# Altium PCB PressureSensor.PcbDoc
Units mil, origin at the board's own origin, x right, y up, seen from the top; angles counter-clockwise.
Board outline 1968.5 x 1968.5 mil, 2 copper layers (Component Side, Bottom Layer), stack 62.8 mil thick; 51 components, 36 nets, 199 pads, 69 vias.
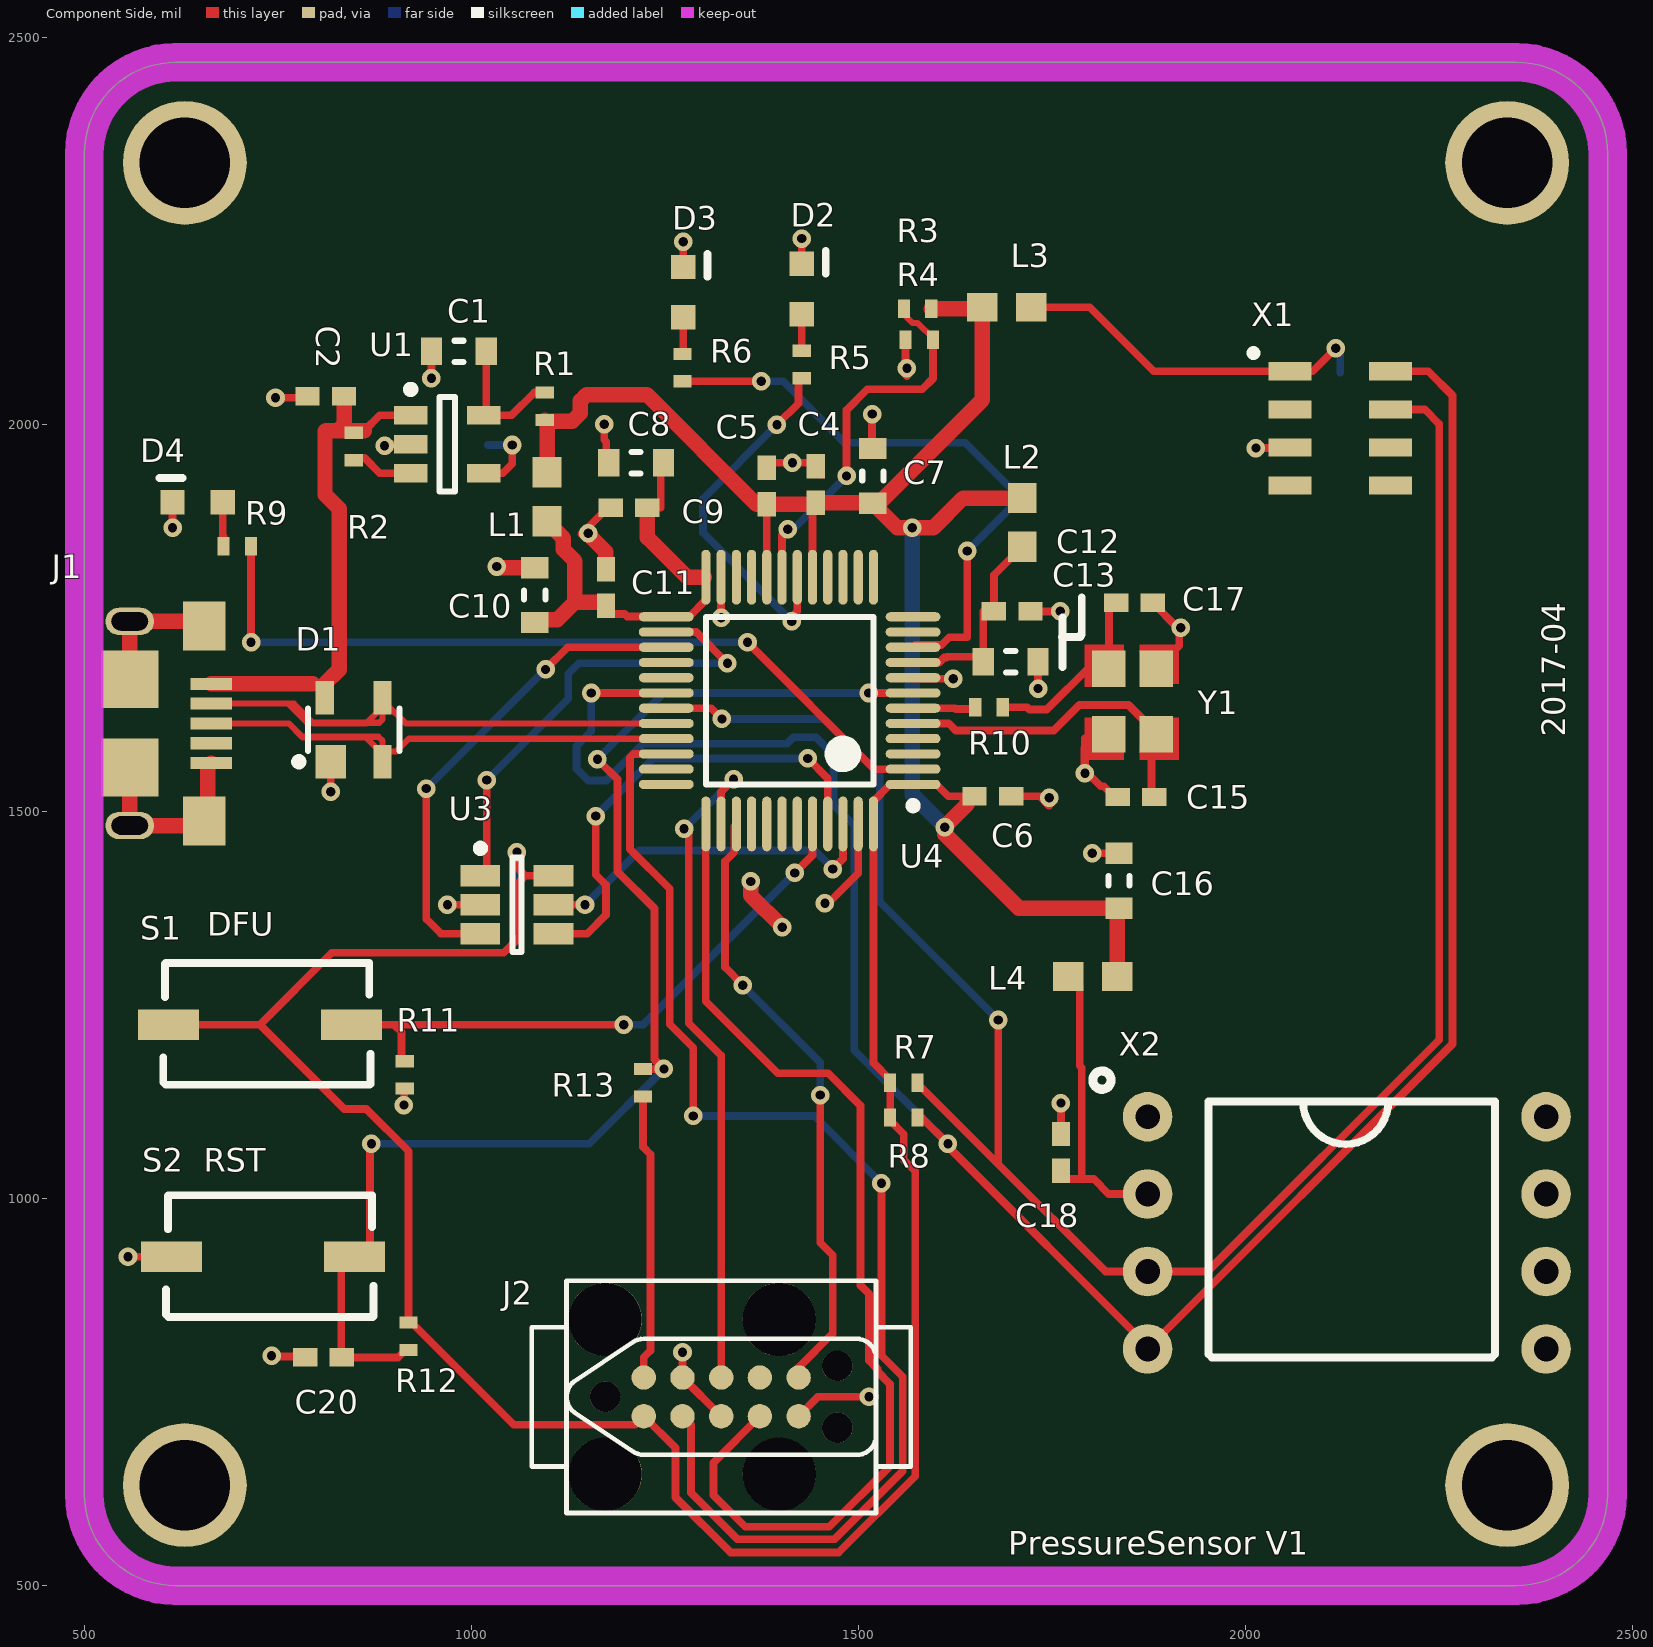
[diagram p0: Component Side view]
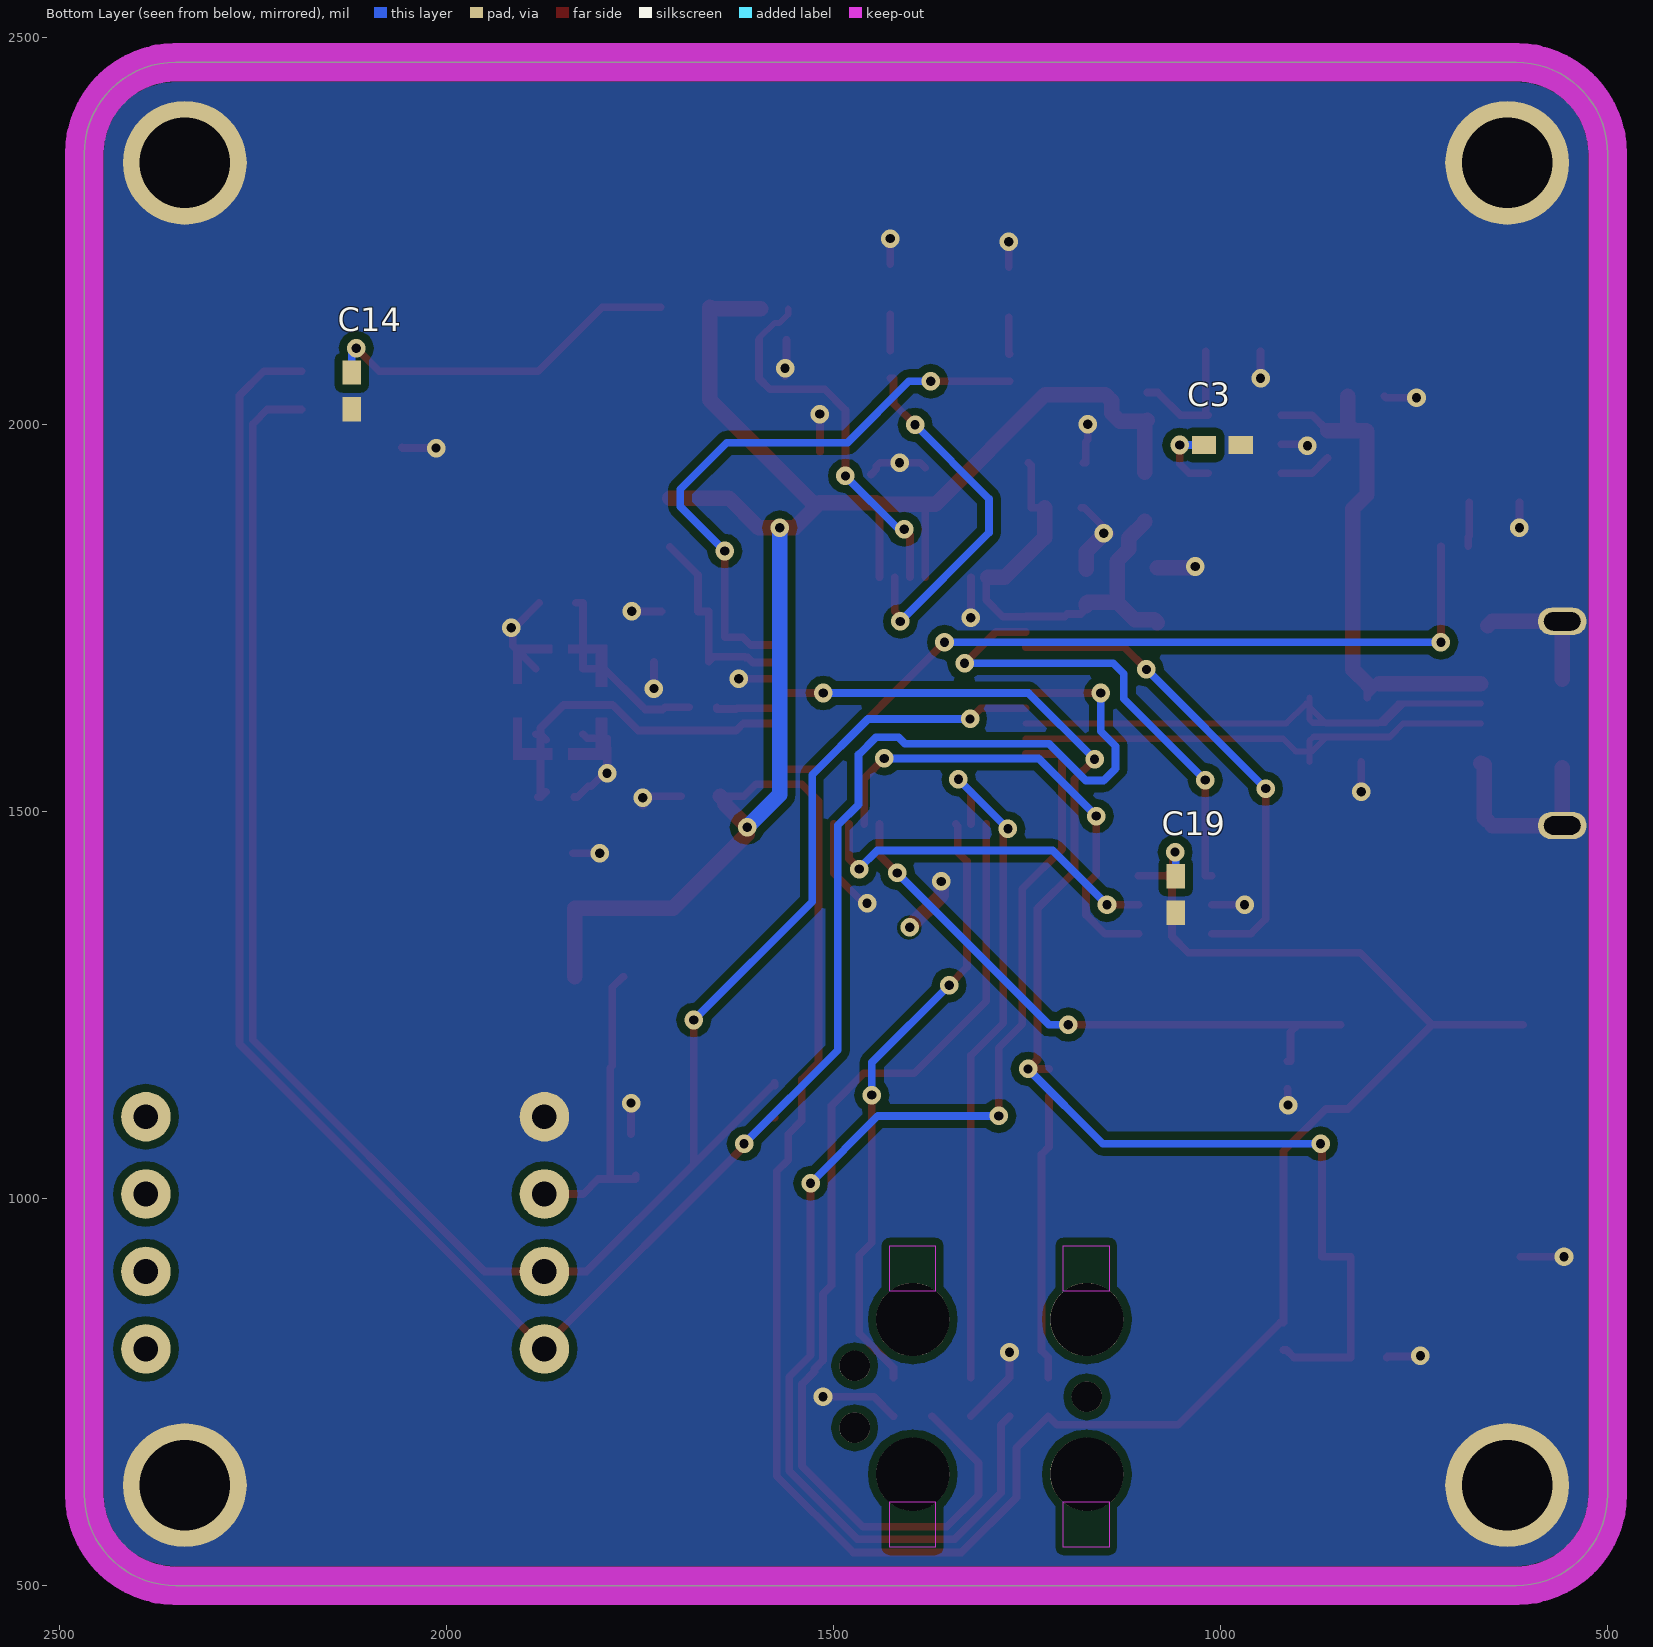
[diagram p1: Bottom Layer view, seen from below]
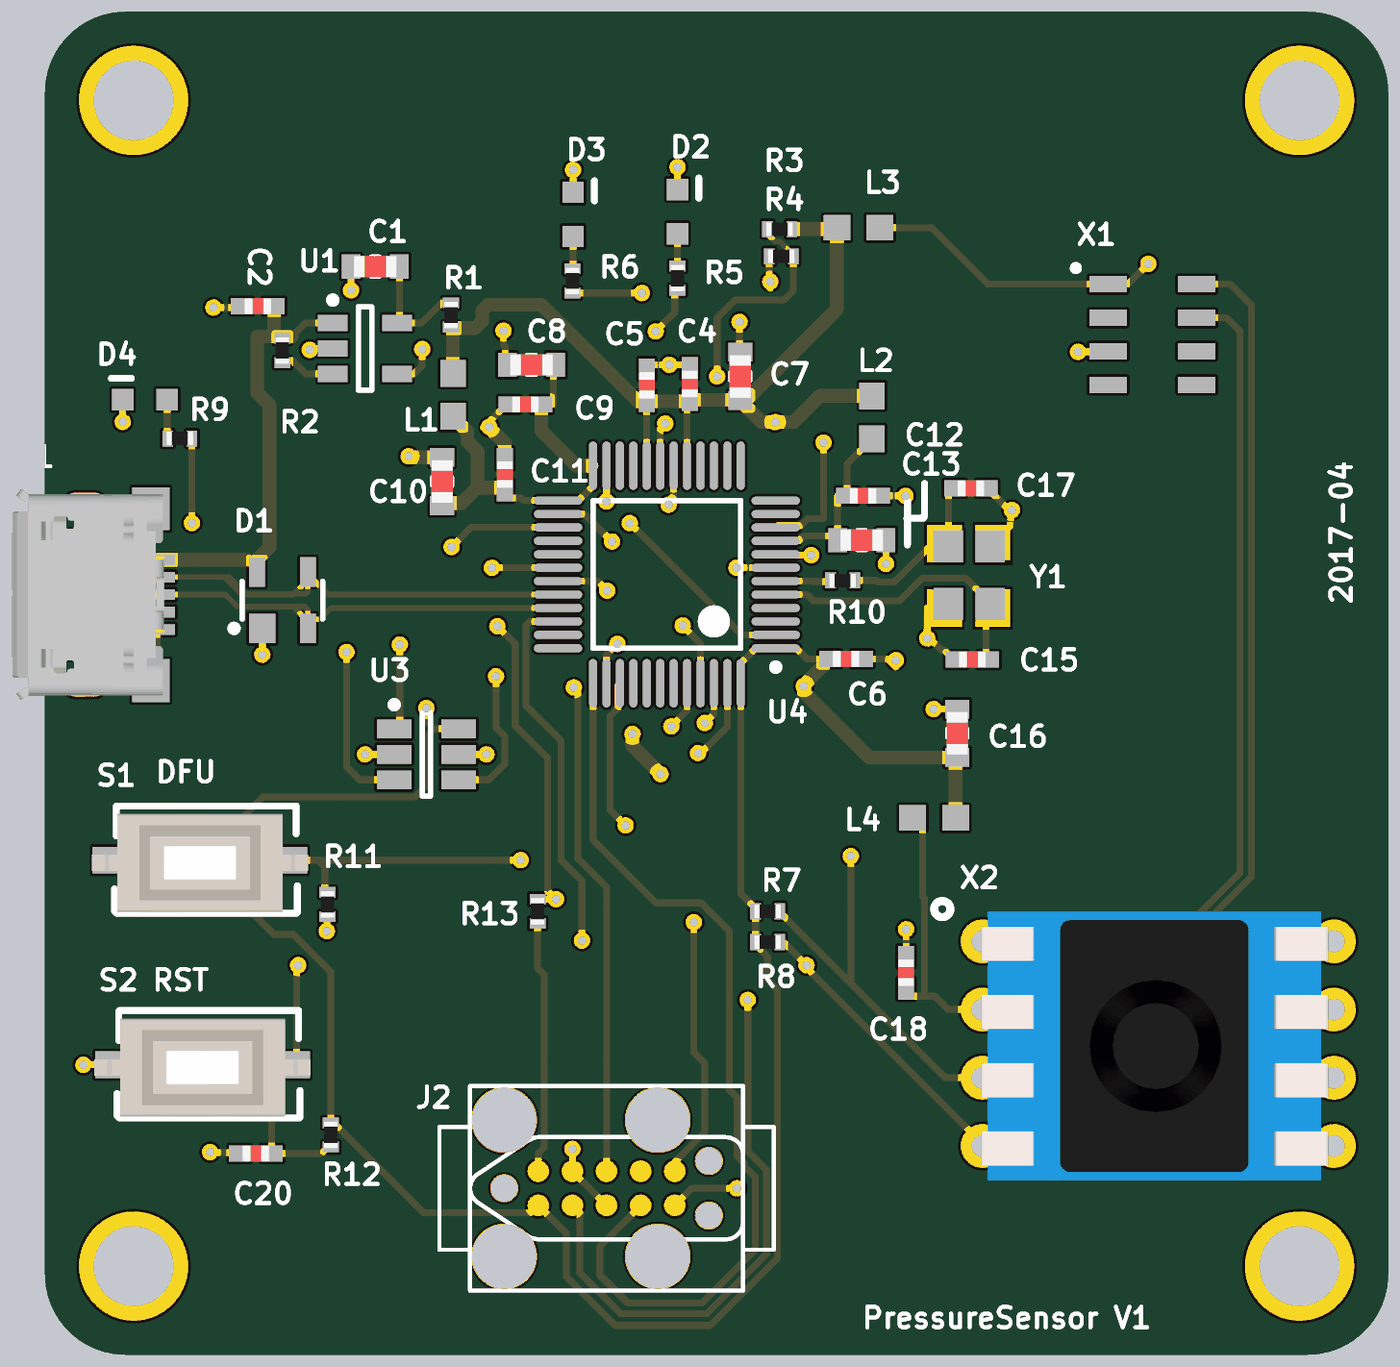
[diagram p2: 3D render of the assembled board from above, using the file's embedded part models]
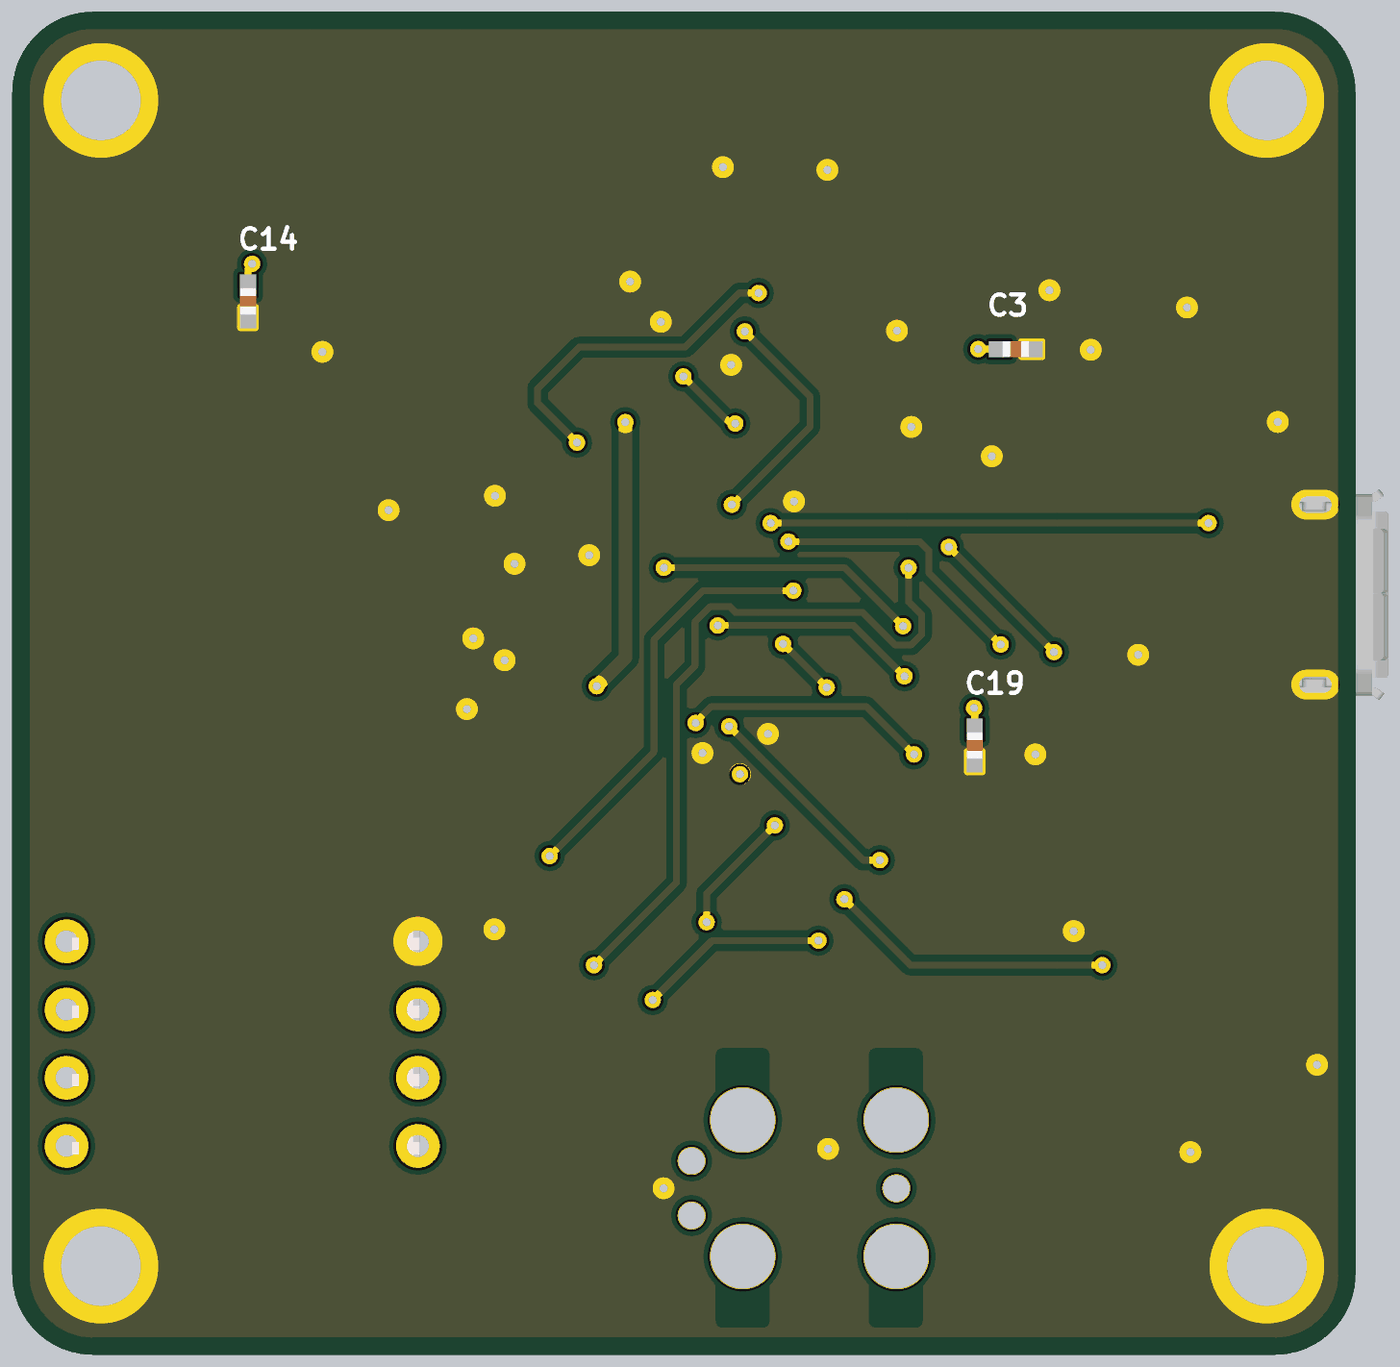
[diagram p3: 3D render of the assembled board from below, using the file's embedded part models]

## Layer stack, top to bottom
Top Solder: solder mask 0.4, Solder Resist, Dk 3.5
Component Side: signal copper 1.4
Dielectric 1: core 60, FR-4, Dk 4.2
Bottom Layer: signal copper 1.4
Solder Side: solder mask 0.4, Solder Resist, Dk 3.5

## Board outline
618.11,500 cw(c618.11,618.11) 500,618.11 500,2350.39 cw(c618.11,2350.39) 618.11,2468.5 2350.39,2468.5 cw(c2350.39,2350.39) 2468.5,2350.39 2468.5,618.11 cw(c2350.39,618.11) 2350.39,500

## Design rules (kind name [scope] priority, off if disabled: settings)
Clearance CPWGND2KEEPOUT [InNet('GND') vs OnLayer('Keep-Out Layer')] p1: gap=0 ignorepadtopadclearanceinfootprint=FALSE
Clearance BlockingCapClear [InPadClass('RFBlockingCapPadClass') vs InNet('GND')] p2: gap=15 ignorepadtopadclearanceinfootprint=FALSE except(0: Arc-Hole Track-Hole SMDPad-Hole THPad-Hole Via-Hole Fill-Hole Poly-Hole Region-Hole Text-Hole)
Clearance ClearanceCoplanar [(InPolygon AND InNet('GND')) vs InNetClass('Coplanar')] p3: gap=7 ignorepadtopadclearanceinfootprint=FALSE except(0: Arc-Hole Track-Hole SMDPad-Hole THPad-Hole Via-Hole Fill-Hole Poly-Hole Region-Hole Text-Hole)
Clearance PolyRegion [(IsRegion AND OnLayer('Top Layer'))] p4: gap=5 ignorepadtopadclearanceinfootprint=FALSE except(0: Arc-Hole Track-Hole SMDPad-Hole THPad-Hole Via-Hole Fill-Hole Poly-Hole Region-Hole Text-Hole)
Clearance ClearanceTrackTrack [(IsTrack OR IsPad) vs (IsTrack OR IsPad)] p5: gap=6 ignorepadtopadclearanceinfootprint=FALSE except(0: Arc-Hole Track-Hole SMDPad-Hole THPad-Hole Via-Hole Fill-Hole Poly-Hole Region-Hole Text-Hole)
Clearance Fill [(IsFill AND OnLayer('Top Layer'))] p6: gap=5 ignorepadtopadclearanceinfootprint=FALSE except(0: Arc-Hole Track-Hole SMDPad-Hole THPad-Hole Via-Hole Fill-Hole Poly-Hole Region-Hole Text-Hole)
Clearance OtherFillClearance [NOT InNamedPolygon('TOPCOPLANAR')] p7: gap=10 ignorepadtopadclearanceinfootprint=FALSE except(0: Arc-Hole Track-Hole SMDPad-Hole THPad-Hole Via-Hole Fill-Hole Poly-Hole Region-Hole Text-Hole)
DiffPairsRouting [All] p1: maxlimit=15 minlimit=8 mostfreqgap=10 toplayer_minwidth=5 toplayer_maxwidth=15 toplayer_prefwidth=8 bottomlayer_minwidth=5 bottomlayer_maxwidth=15 bottomlayer_prefwidth=8 maxuncoupledlength=500
MinimumSolderMaskSliver SilkToSolderMaskClearance [IsPad] p2: minsoldermaskwidth=10
MinimumSolderMaskSliver SilkscreenOverComponentPads [All] p3: minsoldermaskwidth=10
PlaneClearance PlaneClearance_1 [OnLayer('Keep-Out Layer')] p1 off: clearance=0
PlaneClearance [All] p2: clearance=7
PlaneConnect [All] p1: planeconnectstyle=Direct reliefexpansion=20 reliefentries=4 reliefconductorwidth=10 reliefairgap=7
PolygonConnect [All] p1: connectstyle=Direct reliefconductorwidth=10 reliefentries=4 polygonreliefangle="90 Angle" airgapwidth=10
RoutingCorners RoutingCorners_RF [InNetClass('RF')] p1: cornerstyle=Round minsetback=400 maxsetback=400
RoutingCorners [All] p2: cornerstyle=45-Degree minsetback=100 maxsetback=100
RoutingVias [All] p1: holewidth=12 width=24 viastyle="Through Hole" minholewidth=8 minwidth=16 maxholewidth=250 maxwidth=160
SilkToSolderMaskClearance SilkToSolderMaskClearance_1 [IsPad] p1: minsilkscreentomaskgap=10 clearancetoexposedcopper=TRUE
SolderMaskExpansion [All] p1: expansion=4
Width [All] p1: maxlimit=200 minlimit=4 preferedwidth=10
25 further rules are at their usual default settings.

## Classes and differential pairs
component class Sheet1: C1 C2 C3 C4 C5 C6 C7 C8 C9 C10 C11 C12 C13 D1 J1 L1 L2 R1 R2 R3 R4 U1
component class Sheet2: C14 C15 C16 C17 C18 C19 C20 D2 D3 D4 J2 L3 L4 R5 R6 R7 R8 R9 R10 R11 R12 R13 S1 S2 U3 U4 X1 X2 Y1
differential pair USB: +USB_P -USB_N

## Components (designator, comment, footprint, x,y, rotation, side; value= is the part's Value field where it differs from the comment)
C1 "4.7uF" CAP0603 984,2095 r0 top
C2 "1uF" CAP0402 812,2037 r0 top
C3 "0.1uF" CAP0402 998,1974 r0 bottom
C4 "0.1uF" CAP0402 1445,1923 r90 top
C5 "0.1uF" CAP0402 1382,1921 r270 top
C6 "0.1uF" CAP0402 1674,1520 r180 top
C7 "4.7uF" CAP0603 1519,1934 r270 top
C8 "1uF" CAP0603 1213,1951 r0 top
C9 "0.01uF" CAP0402 1204,1893 r0 top
C10 "1uF" CAP0603 1082,1780 r270 top
C11 "0.01uF" CAP0402 1174,1790 r270 top
C12 "0.1uF" CAP0402 1699,1759 r180 top
C13 "1uF" CAP0603 1697,1694 r180 top
C14 "0.01uF" CAP0402 2123,2044 r270 bottom
C15 "30pF" CAP0402 1859,1519 r0 top
C16 "4.7uF" CAP0603 1837,1411 r90 top
C17 "30pF" CAP0402 1857,1770 r180 top
C18 "0.01uF" CAP0402 1762,1060 r90 top
C19 "0.1uF" CAP0402 1058,1393 r270 bottom
C20 "1uF" CAP0402 809,795 r0 top
D1 "PRTR5V0U2X" SOT190P230X110-4N 848,1606 r90 top
D2 "GRN" KINGBRIGHT_LED 1427,2143.04 r90 top
D3 "RED" KINGBRIGHT_LED 1274,2139.04 r90 top
D4 "RED" KINGBRIGHT_LED 678.96,1900 r180 top
J1 "FCI10118193" FCI_10118193 664,1614.18 r270 top locked
J2 "TagConnect TC2050" TC2050-IDC 1223,719 r0 top
L1 "MMZ1608Y102B" INDC1608X06N 1098,1907 r270 top
L2 "MMZ1608Y102B" INDC1608X06N 1712,1874 r270 top
L3 "MMZ1608Y102B" INDC1608X06N 1692,2152 r180 top
L4 "MMZ1608Y102B" INDC1608X06N 1803,1287 r0 top
R1 "0.1" RES0402 1095,2024 r270 top
R2 "10.0K" RES0402 848,1972 r270 top
R3 "0" RES0402 1576.72,2150 r0 top
R4 "100K" RES0402 1579,2110 r0 top
R5 "100" RES0402 1427,2078 r90 top
R6 "100" RES0402 1273,2074 r270 top
R7 "10.0K" RES0402 1559,1150 r0 top
R8 "10.0K" RES0402 1559,1105 r0 top
R9 "100" RES0402 697.72,1843 r0 top
R10 "100" RES0402 1669,1635 r0 top
R11 "10.0K" RES0402 914,1160 r270 top
R12 "10.0K" RES0402 919,822.28 r90 top
R13 "0" RES0402 1222,1150 r90 top
S1 "PTS635" PTS635 845.22,1225 r180 top
S2 "PTS635" PTS635 849,925 r180 top
U1 "" TI-DBV5_N 969,1975 r0 top
U3 "93AA66AT" SOT-23-OT6_M 1059,1380 r0 top
U4 "" STM-LQFP48_N 1411.45,1643.73 r180 top
X1 "MS860702BA01-50" TETempHumidityPressSens 2058,2069.21 r0 top
X2 "SSCDANN150PG2A3" HoneywellPsenseDIP 1874.04,1106 r0 top
Y1 "16.000 MHz" CRYSTAL_SMD_3.2x2.5 1824,1685 r270 top

## Footprints (in the part's own frame and the unit in brackets; to place one, negate y for a bottom-side part, rotate by r counter-clockwise, add the part's x,y. Pads: shape width x height; smd on the part's side, far side on the other; paste and mask are expansions set on the pad)
CAP0402 [mm] "Chip Capacitor, 2-Leads, Body 1.0x0.5mm, IPC Medium Density"
  rect 0.8x0.6 smd: 1(-0.6,0) 2(0.6,0)
  body extent -0.5,-0.3 0.5,0.3, height 0.2
CAP0603 [mm] "Chip Capacitor, 2-Leads, Body 1.6x0.8mm, IPC Medium Density"
  rect 0.7x0.9 smd: 1(-0.9,0) 2(0.9,0)
  silkscreen extent -0.15,-0.35 0.15,0.35, body extent -0.8,-0.4 0.8,0.4, height 0.3
CRYSTAL_SMD_3.2x2.5 [mm] "CTS Model 403 Crystal 3.2mm x 2.5mm"
  rect 1.2x1.1 smd: 1(0,0) 2(2.15,0) 3(2.15,1.55) 4(0,1.55)
  Component Side region: -0.8,-0.5 -0.5,-0.5 -0.5,0.5 -0.8,0.5
  Component Side region: -0.8,-0.8 0.6,-0.8 0.6,-0.4 -0.8,-0.4
  Component Side region: -0.8,1 -0.5,1 -0.5,2.3 -0.8,2.3
  Component Side region: -0.8,2 0.5,2 0.5,2.3 -0.8,2.3
  Component Side region: 1.6,-0.8 3,-0.8 3,-0.4 1.6,-0.4
  Component Side region: 2.6,-0.8 3,-0.8 3,0.5 2.6,0.5
  Component Side region: 1.6,2 3,2 3,2.3 1.6,2.3
  Component Side region: 2.6,1 3,1 3,2.3 2.6,2.3
  body extent -0.53,-0.48 2.67,2.02, height 0.8
FCI_10118193 [mm] "USB MICRO-B FEMALE TH GND"
  rect 0.4x1.35 smd: 1(-1.3,0) 2(-0.65,0) 3(0,0) 4(0.65,0) 5(1.3,0)
  oval 0.9x1.6 hole 0.6 slot 1.2 at 90 deg: 6(-3.35,-2.675) 6(3.35,-2.675)
  rect 1.6x1.4 smd: 6(-3.2,-0.225) 6(3.2,-0.225)
  rect 1.9x1.9 smd: 6(-1.45,-2.675) 6(1.45,-2.675)
  body extent -3.93,-5.39 3.93,0.27, height 2.8
HoneywellPsenseDIP [mm] "Honeywell Pressure Sensor DIP AN package"
  round 1.626 hole 0.813: 1(0,0) 2(0,-2.54) 3(0,-5.08) 4(0,-7.62) 5(13.08,-7.62) 6(13.08,-5.08) 7(13.08,-2.54) 8(13.08,0)
  silkscreen extent -1.8,-7.9 11.4,1.5, body extent -0.08,-8.9 12.88,1.1, height 14.8
INDC1608X06N [mm] "Chip Inductor, 2-Leads, Body 1.6x0.8mm, IPC Medium Density"
  rect 1x0.95 smd: 1(-0.8,0) 2(0.8,0)
  body extent -0.88,-0.48 0.87,0.48, height 0.6
KINGBRIGHT_LED [mm] "Kingbright APT1608 LED"
  rect 0.8x0.8 smd: 1(0,0) 2(1.65,0)
  silkscreen extent 1.33,-0.79 2.08,-0.79, body extent 0.03,-0.4 1.63,0.4, height 0.76
PTS635 [mm] "Pushbutton switch 6x3.5mm"
  rect 2x1 smd: 1(0,0) 2(6,0)
  silkscreen extent -0.63,-2.02 6.18,1.98, body extent -1.03,-1.73 7.02,1.93, height 2.51
RES0402 [mm]
  rect 0.4x0.6 smd: 1(-0.45,0) 2(0.45,0)
  body extent -0.5,-0.25 0.5,0.25, height 0.3
SOT190P230X110-4N [mm] "SOT143, 4-Leads, Body 3.0x2.5mm (max), Pitch 1.90mm, IPC Medium Density"
  rect 1.1x1 smd: 1(-1.05,0.75)
  rect 1.1x0.6 smd: 2(-1.05,-0.95) 3(1.05,-0.95) 4(1.05,0.95)
  silkscreen extent -1.17,-1.5 0.7,1.92, body extent -0.7,-1.5 0.7,1.5, height 1.1
SOT-23-OT6_M [mm] "SOT23, 6-Leads, Body 2.9x1.7mm, Pitch 0.95mm, Lead Span 2.8mm, IPC Low Density"
  rect 1.3x0.7 smd: 1(-1.2,0.95) 2(-1.2,0) 3(-1.2,-0.95) 4(1.2,-0.95) 5(1.2,0) 6(1.2,0.95)
  silkscreen extent -1.32,-1.55 0.15,1.97, body extent -0.9,-1.55 0.9,1.55, height 1.45
STM-LQFP48_N [mm] "QFP, 48-Leads, Body 7x7mm, Pitch 0.5mm, IPC Medium Density"
  oval 1.8x0.3 smd: 1(-4.05,2.75) 2(-4.05,2.25) 3(-4.05,1.75) 4(-4.05,1.25) 5(-4.05,0.75) 6(-4.05,0.25) 7(-4.05,-0.25) 8(-4.05,-0.75) 9(-4.05,-1.25) 10(-4.05,-1.75) 11(-4.05,-2.25) 12(-4.05,-2.75) 25(4.05,-2.75) 26(4.05,-2.25) 27(4.05,-1.75) 28(4.05,-1.25) 29(4.05,-0.75) 30(4.05,-0.25) 31(4.05,0.25) 32(4.05,0.75) 33(4.05,1.25) 34(4.05,1.75) 35(4.05,2.25) 36(4.05,2.75)
  oval 0.3x1.8 smd: 13(-2.75,-4.05) 14(-2.25,-4.05) 15(-1.75,-4.05) 16(-1.25,-4.05) 17(-0.75,-4.05) 18(-0.25,-4.05) 19(0.25,-4.05) 20(0.75,-4.05) 21(1.25,-4.05) 22(1.75,-4.05) 23(2.25,-4.05) 24(2.75,-4.05) 37(2.75,4.05) 38(2.25,4.05) 39(1.75,4.05) 40(1.25,4.05) 41(0.75,4.05) 42(0.25,4.05) 43(-0.25,4.05) 44(-0.75,4.05) 45(-1.25,4.05) 46(-1.75,4.05) 47(-2.25,4.05) 48(-2.75,4.05)
  silkscreen extent -4.18,-2.75 2.75,3.57, body extent -3.5,-3.5 3.5,3.5, height 1.6
TC2050-IDC [mm]
  round 0.8 smd paste-0.9: 1(0,0) 2(1.27,0) 3(2.54,0) 4(3.81,0) 5(5.08,0) 6(5.08,1.27) 7(3.81,1.27) 8(2.54,1.27) 9(1.27,1.27) 10(0,1.27)
  round 1 hole 1 paste-1.1: A(-1.27,0.635) B(6.35,-0.381) C(6.35,1.651)
  round 2.4 hole 2.4 paste-2.5: D(-1.27,-1.905) E(4.445,-1.905) F(4.445,3.175) G(-1.27,3.175)
  Bottom Layer keep-out region: 3.7,4.1 5.2,4.1 5.2,5.6 3.7,5.6
  Bottom Layer keep-out region: -2,4.1 -0.5,4.1 -0.5,5.6 -2,5.6
  Bottom Layer keep-out region: 3.7,-4.3 5.2,-4.3 5.2,-2.8 3.7,-2.8
  Bottom Layer keep-out region: -2,-4.3 -0.5,-4.3 -0.5,-2.8 -2,-2.8
  silkscreen extent -3.68,-3.17 8.76,4.44
TETempHumidityPressSens [mm] "TE Connectivity MS8607-02BA01"
  rect 1.4x0.6 smd: 1(0,0) 2(0,-1.25) 3(0,-2.5) 4(0,-3.75) 5(3.3,-3.75) 6(3.3,-2.5) 7(3.3,-1.25) 8(3.3,0)
  silkscreen extent -1.3,0.5 -1.1,0.7
TI-DBV5_N [mm] "SOT23, 5-Leads, Body 2.9x1.6mm, Pitch 0.95mm, IPC Medium Density"
  rect 1.1x0.6 smd: 1(-1.2,0.95) 2(-1.2,0) 3(-1.2,-0.95) 4(1.2,-0.95) 5(1.2,0.95)
  silkscreen extent -1.32,-1.55 0.25,1.92, body extent -0.87,-1.52 0.87,1.53, height 1.45

## Part data
C1 C7 C16: library part 878, "CAP 4.7uF +/-10% 10V X6S 0603", Dielectric=X6S, Manufacturer=TDK, Manufacturer PN=C1608X6S1A475K, Tolerance=+/-10%, Voltage=10V, ComponentLink1Description=Datasheet, ComponentLink1URL=http://www.tdk.com/pdf/general_B11.pdf, ID=878, MaxComponentHeight=0.9mm, PkgCode=0603
C2 C20: library part 596, "CAP 1uF +/-10% 10V X5R 0402", Dielectric=X5R, Manufacturer=TDK, Manufacturer PN=C1005X5R1A105K, Tolerance=+/-10%, Voltage=10V, ComponentLink1Description=Datasheet, ComponentLink1URL=http://www.tdk.com/pdf/general_B11.pdf, ID=596, MaxComponentHeight=0.55mm, PkgCode=0402
C3 C4 C5 C6 C12 C19: library part 485, "CAP 0.1uF +/-10% 25V X7R 0402", Dielectric=X7R, Manufacturer=TDK, Manufacturer PN=C1005X7R1E104K, Tolerance=+/-10%, Voltage=25V, ComponentLink1Description=Datasheet, ComponentLink1URL=http://www.tdk.com/pdf/general_B11.pdf, ID=485, MaxComponentHeight=0.55mm, PkgCode=0402
C8 C10 C13: library part 820, "CAP 1uF +/-10% 25V X7R 0603", Dielectric=X7R, Manufacturer=TDK, Manufacturer PN=C1608X7R1E105K, Tolerance=+/-10%, Voltage=25V, ComponentLink1Description=Datasheet, ComponentLink1URL=http://www.tdk.com/pdf/general_B11.pdf, ID=820, MaxComponentHeight=0.9mm, PkgCode=0603
C9 C11 C14 C18: library part 514, "CAP 0.01uF +/-20% 50V X6S 0402", Dielectric=X6S, Manufacturer=TDK, Manufacturer PN=C1005X6S1H103M, Tolerance=+/-20%, Voltage=50V, ComponentLink1Description=Datasheet, ComponentLink1URL=http://www.tdk.com/pdf/general_B11.pdf, ID=514, MaxComponentHeight=0.55mm, PkgCode=0402
C15 C17: library part 388, "CAP 30pF +/-5% 50V C0G 0402", Dielectric=C0G, Manufacturer=TDK, Manufacturer PN=C1005C0G1H300J, Tolerance=+/-5%, Voltage=50V, ComponentLink1Description=Datasheet, ComponentLink1URL=http://www.tdk.com/pdf/general_B11.pdf, ID=388, MaxComponentHeight=0.55mm, PkgCode=0402
D1: "Diode Array, ESD Protection 1pF USB2.0 SOT143", Manufacturer="NXP Semiconductors", Supplier Part Number 1=568-4140-1-ND, ComponentLink1Description=Datasheet, ComponentLink1URL=http://www.nxp.com/documents/data_sheet/PRTR5V0U2X.pdf, Manufacturer PN=PRTR5V0U2X, Supplier 1=Digi-Key, Supplier 2=Mouser, Supplier 3=Newark, Supplier Part Number 2=771-PRTR5V0U2X-T/R, Supplier Part Number 3=75R4845
D2: library part LED_GRN_SMD_0603, "LED 1.6X0.8MM 568NM GRN CLR SMD", Manufacturer=Kingbright, Manufacturer PN=APT1608SGC, Supplier Part Number 1=604-APT1608SGC, ComponentLink1Description=Datasheet, ComponentLink1URL=http://www.us.kingbright.com/images/catalog/SPEC/APT1608SURCK.pdf, Supplier 1=Mouser, Supplier 2=Digi-Key, Supplier 3=Newark, Supplier Part Number 2=754-1121-6-ND, Supplier Part Number 3=75R0578
D3 D4: library part LED_RED_SMD_0603, "LED 1.6X0.8MM 630NM RED CLR SMD", Manufacturer=Kingbright, Manufacturer PN=APT1608SURCK, Supplier Part Number 1=604-APT1608SURCK, ComponentLink1Description=Datasheet, ComponentLink1URL=http://www.us.kingbright.com/images/catalog/SPEC/APT1608SURCK.pdf, Supplier 1=Mouser, Supplier 2=Digi-Key, Supplier 3=Newark, Supplier Part Number 2=754-1123-1-ND, Supplier Part Number 3=75R0573
J1: library part CONN_USB_MICRO-B_HORIZ_TH, "Connector Receptacle USB - micro B 2.0 5 Position Surface Mount, Right Angle, Horizontal", Manufacturer=FCI, Manufacturer PN=10118193-0001LF, Supplier Part Number 1=70236827, Supplier 1=Allied, Supplier 2=Digi-Key, Supplier Part Number 2=609-4616-1-ND
J2: library part TC2050_ARMJTAG, "TagConnect TC2050-IDC For ARM JTAG", Manufacturer="Tag-Connect LLC", Manufacturer PN=TC2050-IDC, ComponentLink1Description=Datasheet, ComponentLink1URL=http://www.tag-connect.com/Materials/TC2050-IDC%20Datasheet.pdf
L1 L2 L3 L4: "Ferrite, 1000oh, 400mA, 0603", Supplier Part Number 1=33P7606, ComponentLink1Description=Datasheet, ComponentLink1URL=http://www.tdk.co.jp/tefe02/e9412_mmz.pdf, Supplier 1=Newark, Supplier 2=Digi-Key, Supplier Part Number 2=445-1552-1-ND
R1: library part 0402_0.1ohm, "RES .1 OHM 1/6W 1% 0402 SMD", Manufacturer=Panasonic, Manufacturer PN=ERJ-2BSFR10X, Supplier Part Number 1=41790361S8773345N1386, Supplier 1=Arrow, Supplier 2=Newark, Supplier 3=Digi-Key, Supplier 4=Allied, Supplier Part Number 2=53W4137, Supplier Part Number 3=P.10AKDKR-ND, Supplier Part Number 4=70260854
R2 R7 R8 R11 R12: library part 963, "Resistor SMT 0402 10.0K 1% ohm", Manufacturer=Vishay, Manufacturer PN=CRCW040210K0FKED, Power=1/16W, Supplier Part Number 1=541-10.0KLCT-ND, Tempco=100ppm/C, Tolerance=1%, ComponentLink1Description=Datasheet, ComponentLink1URL=http://www.vishay.com/docs/20035/dcrcwe3.pdf, ID=963, PkgCode=0402, Supplier 1=Digi-Key
R3 R13: library part 578, "Resistor SMT 0402 0 1% ohm", Manufacturer=Vishay, Manufacturer PN=CRCW04020000Z0ED, Power=1/16W, Supplier Part Number 1=541-0.0JCT-ND, Tempco=100ppm/C, Tolerance=1%, ComponentLink1Description=Datasheet, ComponentLink1URL=http://www.vishay.com/docs/20035/dcrcwe3.pdf, ID=578, PkgCode=0402, Supplier 1=Digi-Key
R4: library part 1059, "Resistor SMT 0402 100K 1% ohm", Manufacturer=Vishay, Manufacturer PN=CRCW0402100KFKED, Power=1/16W, Supplier Part Number 1=541-100KLCT-ND, Tempco=100ppm/C, Tolerance=1%, ComponentLink1Description=Datasheet, ComponentLink1URL=http://www.vishay.com/docs/20035/dcrcwe3.pdf, ID=1059, PkgCode=0402, Supplier 1=Digi-Key
R5 R6 R9 R10: library part 771, "Resistor SMT 0402 100 1% ohm", Manufacturer=Vishay, Manufacturer PN=CRCW0402100RFKED, Power=1/16W, Supplier Part Number 1=541-100LCT-ND, Tempco=100ppm/C, Tolerance=1%, ComponentLink1Description=Datasheet, ComponentLink1URL=http://www.vishay.com/docs/20035/dcrcwe3.pdf, ID=771, PkgCode=0402, Supplier 1=Digi-Key
S1 S2: library part PushButton_6x3.5mm, "SWITCH TACTILE SPST-NO 0.05A 12V", Manufacturer="C&K Components", Manufacturer PN="PTS635SK25SMTR LFS", Supplier Part Number 1=611-PTS635SK25SMTRLF, ComponentLink1Description=Datasheet, ComponentLink1URL=http://www.ck-components.com/index.php?module=media&action=Display&cmpref=14408&lang=en&width=&height=&format=&alt=, Supplier 1=Mouser, Supplier 2=Arrow, Supplier 3=Digi-Key, Supplier Part Number 2=46873448S8337634N9444, Supplier Part Number 3=CKN9076DKR-ND
U1: library part LP2985-33DBVR, "Single Output Low Noise LDO, 150 mA, Fixed 3.3 V Output, 2.2 to 16 V Input, with Low IQ, 5-pin SOT-23 (DBV), -40 to 125 degC, Green (RoHS & no Sb/Br)", Manufacturer="Texas Instruments", Supplier Part Number 1=296-18476-6-ND, Accuracy(%)=1.5, Code_JEDEC=MO-178, ComponentLink1Description="Manufacturer URL", ComponentLink1URL=http://www.ti.com/, ComponentLink2Description=Datasheet, ComponentLink2URL=http://www.ti.com/general/docs/lit/getliterature.tsp?genericPartNumber=LP2985-10&fileType=pdf, ComponentLink3Description="Package Specification", ComponentLink3URL=http://www.ti.com/litv/pdf/mpds018i, DatasheetVersion=SLVS522N, Eco-Plan="Green (RoHS & no Sb/Br)", Fixed Output Options(V)=3.3, Iout(Max)(A)=0.15, Iq(Typ)(mA)=0.85, Mounting Technology="Surface Mount", PackageDescription="5-Pin Plastic Small Outline, Body 1.60 × 2.90 mm, Pitch 0.95 mm", PackageReference=DBV5, PackageVersion=4073253-4/K, PartNumber=LP2985-33DBVR, SubFamily="Single Channel LDO", Supplier 1=Digi-Key, Supplier 2=Newark, Supplier Part Number 2=43J9346, Vdo(Typ)(mV)=280, Vin(Max)(V)=16, Vin(Min)(V)=2.2, Vout Adj(Max)(V)=10, Vout Adj(Min)(V)=10
U3: library part 93AA66AT_SOT23-6, "IC EEPROM 4KBIT 2MHZ SOT23-6", Manufacturer="Microchip Technology", Manufacturer PN=93AA66AT-I/OT, Supplier Part Number 1=93AA66AT-I/OTCT-ND, ComponentLink1Description=Datasheet, ComponentLink1URL=http://www.microchip.com/mymicrochip/filehandler.aspx?ddocname=en011819, Supplier 1=Digi-Key
U4: library part STM32F373CCT6, "ARM Cortex-M4 32-bit MCU, 256 KB Flash, 32 KB Internal RAM, 36 I/Os, 48-pin LQFP, -40 to 85 degC, Tray", I/Os (High Current)=36, Operating Frequency(F) (Processor speed) (MHz)=72, Supplier Part Number 1=497-13251-ND, Supply Voltage(Vcc) min (V)=2, ComponentLink1Description="Manufacturer URL", ComponentLink1URL=http://www.st.com/web/en/home.html, ComponentLink2Description=Datasheet, ComponentLink2URL=http://www.st.com/st-web-ui/static/active/en/resource/technical/document/datasheet/DM00046749.pdf, ComponentLink3Description="Package Specification", ComponentLink3URL=http://www.st.com/st-web-ui/static/active/en/resource/technical/document/datasheet/DM00058181.pdf, Core="ARM Cortex-M4", DatasheetVersion="Rev. 3", FLASH Size (Prog) (kB)=256, Internal RAM Size (kB)=32, Mounting Technology="Surface Mount", PackageDescription="48-Pin Low Profile Quad Flat Package, 7 x 7 mm Body, 0.5 mm Pitch", PackageReference=LQFP48, PackageVersion="Rev. 6, 06/2013", Packing=Tray, PartNumber=STM32F373CCT6, Supplier 1=Digi-Key, Supplier 2=Farnell, Supplier 3=Newark, Supplier 4=Newark, Supplier 5=Mouser, Supplier Part Number 2=2215117, Supplier Part Number 3=46W2195, Supplier Part Number 4=48W6893, Supplier Part Number 5=511-STM32F373CCT6
X1: "Humidity, Pressure, Temperature Sensor I²C Output", Manufacturer="TE Connectivity", Supplier Part Number 1=223-1701-1-ND, ComponentLink1Description=Datasheet, ComponentLink1URL=http://www.te.com/commerce/DocumentDelivery/DDEController?Action=srchrtrv&DocNm=MS8607-02BA01&DocType=DS&DocLang=English, ManufacturerPN=MS860702BA01-50, Supplier 1=Digi-Key
X2: "SENSOR PRES 150PSI GAUG 3.3V DIP I2C", Manufacturer=Honeywell, Supplier Part Number 1=480-5413-ND, ComponentLink1Description=Datasheet, ComponentLink1URL=http://sensing.honeywell.com/index.php?ci_id=151134, ManufacturerPN=SSCDANN150PG2A3, Supplier 1=Digi-Key, Supplier 2=Allied, Supplier Part Number 2=70280311
Y1: library part Crystal_16.00MHz_SMD, "CRYSTAL 16.0MHZ 20PF,80ohm PARALLEL SMD +/-10PPM", Manufacturer="CTS-Frequency Controls", Manufacturer PN=403C11E16M00000, Supplier Part Number 1=CTX732DKR-ND, CL=20pf, ComponentLink1Description=Datasheet, ComponentLink1URL=http://www.ctscorp.com/wp-content/uploads/403.pdf, Rm="80 ohm", Supplier 1=Digi-Key

## Free pads (board coordinates)
  round 160 hole 117: 1(629.92,2338.58) 2(2338.58,2338.58) 3(2338.58,629.92) 4(629.92,629.92)

## Via types
v1: diameter 24, hole 12, Component Side to Bottom Layer, 69 vias

## Nets (pads, with @x,y where several pads share a name; then routed paths per layer and width w, separated by ;. In a path a pad name is that pad's centre, name@x,y a point inside that pad or via, vN(x,y) a via of type N, cw(c..) or ccw(c..) an arc to the next point about the centre after c; other vN are vias at no path point)
\SPI2NSS: U3.5 U4.46 | length 464.1
  Component Side w10: U3.5 v1(1147,1380) ; v1(1467,1426) 1480.35,1439.35 U4.46
  Bottom Layer w10: v1(1147,1380) 1217,1450 1444,1450 1467,1427 v1(1467,1426)
BoardRev: R3.1 R4.2 U4.19 | length 492.8
  Component Side w8: R3.1 1559,2142.81 1570,2131.81 1576.56,2131.81 1596.72,2111.65 R4.2
  Component Side w10: U4.19 1401.61,1857.61 v1(1409,1865) ; v1(1485,1934) 1485,2019.28 1511.72,2046 1582.72,2046 1596.72,2060 R4.2
  Bottom Layer w10: v1(1409,1865) 1416,1865 v1(1485,1934)
GND: C1.1 C2.1 C3.1 C4.2 C5.1 C6.1 C7.1 C8.1 C9.1 C10.1 C11.1 C12.1 C13.1 C14.2 C15.1 C16.2 C17.1 C18.2 C19.2 C20.1 D1.1 D2.2 D3.2 D4.2 J1.5 J1.6 J2.3 J2.5 J2.9 pad.1 pad.2 pad.3 pad.4 R4.1 R11.2 S2.2 U1.2 U3.2 U4.8 U4.23 U4.47 X1.3 X2.1 Y1.2 Y1.4 | length 2285.4
  Component Side w10: v1(556.41,925) S2.2 ; v1(614,1867.25) D4.2 ; v1(742,797) 743,796 784.38,796 C20.1 ; v1(747,2035) 786.38,2035 C2.1 ; v1(818.47,1526.01) D1.1 ; v1(888,1973) 890,1975 U1.2 ; v1(913,1121) 913.5,1121.5 913.5,1141.78 R11.2 ; v1(948.57,2060.28) C1.1 ; v1(969.16,1380) U3.2 ; v1@1142.44,1859 v1@1143.44,1860 ; v1(1151,1860) v1@1143.44,1860 ; v1(1172,2001) 1172,1980.86 1174.57,1978.29 1174.57,1951 C8.1 ; C9.1 1176.44,1893 v1@1143.44,1860 ; v1(1273,801.75) J2.9 J2.3 ; D3.2 v1(1274,2236.75) ; v1(1322.87,1750.75) U4.23 ; C5.1 1388.38,1951 v1(1415,1951) 1440.62,1951 C4.2 1445,1942.68 C4.2@1451.81,1935.87 ; J2.5 1448,744 v1(1514,744) ; D2.2 v1(1427,2240.75) ; v1(1457,1382) 1461.18,1382 1500.03,1420.85 U4.47 ; C7.1@1518,1965.28 v1(1518,2014) ; R4.1 1561.28,2064.95 1563,2063.24 v1(1563,2073) ; U4.8 1572.16,1672 v1(1623,1672) ; C6.1 1734.61,1520 1746.61,1508 1747,1508.39 v1(1747,1518) ; C12.1 v1(1761.11,1759) ; v1(1732.43,1659.28) C13.1 ; C18.2 v1(1762,1123.61) ; 1792.5,1582.64 1792.5,1550.5 v1(1793,1550) ; v1(1802.28,1446.43) C16.2 ; Y1.2 1818.65,1595 1793,1595 v1(1793,1550) ; C15.1 1831.44,1519 1817.26,1533.18 1813.61,1533.18 1796.79,1550 v1(1793,1550) ; C17.1 1912.62,1738 v1@1915,1738 ; Y1.4 1915,1714.98 v1@1915,1738 ; v1(1917,1738) v1@1915,1738 ; v1(2014,1970) 2057.21,1970 X1.3
  Component Side w20: J1.6@558.69,1557.09 558.69,1482.29 J1.6@649.24,1482.29 ; J1.6@558.69,1671.27 558.69,1746.07 649.24,1746.07 J1.6@655.14,1740.17 ; J1.6@655.14,1488.2 659.57,1492.63 659.57,1560.87 J1.5 ; v1(1033,1817) 1034.57,1815.43 C10.1 ; v1(1151,1860) 1151,1859 1174,1836 C11.1 ; v1(1361,1410) 1361,1392 v1(1402,1351)
  Bottom Layer w10: v1(1402,1351) v1@1403,1350
I2C2_SCL: R8.2 U4.30 X1.8 X2.4 | length 3047.6
  Component Side w10: v1(1155,1653.57) U4.30 ; R8.2 1582.78,1104.22 v1(1616,1071) ; v1@1616,1067.52 1874.04,809.48 X2.4 2268,1199.96 2268,2038 2236.79,2069.21 X1.8
  Bottom Layer w10: v1(1155,1653.57) 1155,1604 1135.86,1584.86 1135.86,1555.97 1151.41,1540.41 1174.41,1540.41 1222,1588 1408,1588 1416.49,1596.49 1445.49,1596.49 1468,1573.97 1468,1509.44 1494.98,1482.47 1494.98,1192.02 v1(1616,1071)
I2C2_SDA: R7.2 U4.31 X1.7 X2.3 | length 2646.3
  Component Side w10: U4.31 1310,1633.89 v1(1323.89,1620) ; R7.2 1576.72,1146 1579.72,1146 1681,1044.72 ; v1(1681,1231) 1681,1044.72 ; X1.7 2232,2020 2251,2001 2251,1205.59 1951.41,906 1819.72,906 1681,1044.72
  Bottom Layer w10: v1(1323.89,1620) 1455.89,1620 1528,1547.89 1528,1384 v1(1681,1231)
JTCK: J2.4 U4.37 | length 1371
  Component Side w10: U4.37 1303.18,1255.21 1396.15,1162.24 1461.15,1162.24 1503,1120.39 1503,888 1514,877 1514,791.06 1525,780.06 1525,776.69 1541.18,760.5 1541.18,654.44 1462.75,576 1354,576 1313,617 1313,659 J2.4
JTDI: J2.8 U4.38 | length 883.8
  Component Side w10: v1(1275,1478) 1281,1472 1281,1227 1323,1185 J2.8 ; U4.38 1322.87,1525.87 v1(1339,1542)
  Bottom Layer w10: v1(1275,1478) v1(1339,1542)
JTDO: J2.6 U4.39 | length 797.1
  Component Side w10: U4.39 1339.77,1481.5 1339.77,1447.75 1328,1435.98 1328,1299 v1(1351,1276) ; J2.6 1423,782 1467,826 1467,927 1451,943 v1(1451,1134)
  Bottom Layer w10: v1(1351,1276) 1451,1176 v1(1451,1134)
JTMS: J2.2 U4.34 | length 1646.6
  Component Side w10: U4.34 1210,1574.83 1205.05,1569.88 1205.05,1451.95 1256.45,1400.55 1256.45,1225.55 1287,1195 v1(1287,1107) ; J2.2 1284,708 1284,620 1344,560 1469.37,560 1557.58,648.2 1557.58,770.11 1530,797.69 v1(1530,1020)
  Bottom Layer w10: v1(1287,1107) 1443,1107 v1(1530,1020)
JTRST: U4.40
NetC1_2: C1.2 R1.1 U1.5 | length 173.5
  Component Side w10: U1.5 U1.5@1019.43,2012.4 ; C1.2 U1.5@1019.43,2012.4 ; R1.1 1081.31,2041.72 1052,2012.4 U1.5@1019.43,2012.4
NetC3_2: C3.2 U1.4 | length 97.3
  Component Side w10: U1.4 1040.6,1937.6 1053,1950 v1(1053,1974)
  Bottom Layer w10: C3.2 v1(1053,1974)
NetC12_2: C12.2 C13.2 L2.2 U4.9 | length 273.8
  Component Side w10: U4.9 1604.83,1692.94 1611.3,1699.41 1614.06,1699.41 1614.9,1700.26 1655.31,1700.26 C13.2 1661.57,1759 C12.2 1675.38,1805.88 L2.2
NetC14_1: C14.1 L3.1 X1.1 | length 474
  Component Side w10: L3.1 1799.21,2152 1882,2069.21 2087.21,2069.21 v1(2117,2099)
  Bottom Layer w10: v1(2117,2099) 2123,2093 C14.1
NetC15_2: C15.2 U4.5 Y1.3 | length 454.8
  Component Side w10: U4.5 1616.8,1614.2 1626,1605 1752.87,1605 1785.88,1638.01 1849.34,1638.01 1879,1608.35 Y1.3@1879,1600.35 ; C15.2@1871.87,1525.81 1878.68,1519 C15.2@1879,1519 ; Y1.3@1871.87,1593.23 Y1.3@1879,1600.35 ; C15.2 1879,1522.62 Y1.3@1879,1600.35 ; Y1.3 Y1.3@1879,1600.35
NetC17_2: C17.2 R10.2 Y1.1 | length 254.6
  Component Side w10: R10.2 1718.53,1635 1721.25,1632.28 1743.62,1632.28 1746.34,1635 1746.5,1635 1796.5,1685 Y1.1 1824,1770 C17.2
NetC18_1: C18.1 L4.1 X2.2 | length 395.2
  Component Side w10: C18.1@1755.78,1030.16 1755.78,1026.22 1756.37,1025.63 1804.3,1025.63 1823.93,1006 X2.2 ; L4.1 1772.49,1287 1786.19,1273.3 1786.19,1171.71 1789,1168.9 1789,1030.16
NetC20_2: C20.2 R12.1 R13.2 S2.1 U4.7 | length 1729.1
  Component Side w10: v1(871,1071) 869,1069 869,925 S2.1 832,925 832,795 905.43,795 915,804.57 R12.1 ; v1(1163,1568) 1189,1542 1189,1422.77 1236.72,1375.06 1236.72,1180 v1(1249,1167.72) R13.2 ; v1(1513.57,1653.57) U4.7
  Bottom Layer w10: v1(871,1071) 1152.28,1071 v1(1249,1167.72) ; v1(1163,1568) 1248.57,1653.57 v1(1513.57,1653.57)
NetD2_1: D2.1 R5.2 | length 47.3
  Component Side w10: R5.2 D2.1
NetD3_1: D3.1 R6.1 | length 48.3
  Component Side w10: R6.1 1274,2091.72 D3.1
NetD4_1: D4.1 R9.1 | length 57.4
  Component Side w10: D4.1 678.96,1856.04 680,1855 R9.1
NetJ2_10: J2.10 R13.1 | length 370.7
  Component Side w10: R13.1 1222,1066.97 1231.49,1057.48 1231.49,803.49 1223,795 J2.10
NetR2_2: R2.2 U1.3 | length 67.9
  Component Side w10: 862,1957.28 881.69,1937.6 U1.3
NetR5_1: R5.1 U4.18 | length 477
  Component Side w10: v1(1395,2000) 1423,2028 1423,2060.28 R5.1 ; v1(1414,1746) 1414,1752 1421.29,1759.29 U4.18
  Bottom Layer w10: v1(1395,2000) 1299.54,1904.54 1299.54,1860.46 v1(1414,1746)
NetR6_2: R6.2 U4.10 | length 773.8
  Component Side w10: R6.2 v1(1374.72,2056.28) ; U4.10 1573.68,1715.41 1607.43,1715.41 1617.65,1725.63 1641,1725.63 v1(1641,1837)
  Bottom Layer w10: v1(1374.72,2056.28) 1403.06,2056.28 1482.35,1977 1638.2,1977 1698.6,1916.6 1698.6,1894.6 v1(1641,1837)
NetR9_2: R9.2 U4.2 | length 1047.3
  Component Side w10: v1(715.43,1719) R9.2 ; v1(1357,1719) 1520.85,1555.15 U4.2@1570.9,1555.15
  Bottom Layer w10: v1(715.43,1719) v1(1357,1719)
NetR10_1: R10.1 U4.6 | length 82.8
  Component Side w10: U4.6 1625.11,1633.89 1626,1633 1651.28,1633 R10.1
NetR11_1: R11.1 S1.1 U4.44 | length 782.2
  Component Side w10: S1.1 900,1225 ; R11.1 910,1177.72 910,1215 900,1225 ; v1(1197,1225) 900,1225 ; v1(1418,1421) 1440.98,1443.98 U4.44
  Bottom Layer w10: v1(1197,1225) 1222,1225 v1(1418,1421)
P3V3: C4.1 C5.2 C6.2 C7.2 C16.1 C19.1 J2.1 L1.1 L2.1 L3.2 L4.2 R1.2 R3.2 R7.1 R8.1 R12.2 S1.2 U3.6 U4.1 U4.17 U4.20 U4.48 | length 5260.2
  Component Side w10: S1.2 727,1225 ; v1(1059,1448) 1061.68,1445.32 1061.68,1425.72 1070,1417.4 ; U3.6 1070,1417.4 ; U4.20 1381.92,1881.38 1382,1881.46 C5.2 ; U4.17 1440.98,1895.35 C4.1@1443,1897.38 ; C6.2 1646.44,1520 1616.38,1520 1600.92,1535.46 1541.37,1535.46 1519.72,1513.81 1519.72,1175.51 1541.28,1153.94 1541.28,1101.06 1558.87,1083.48 1558.87,1050.13 1573.58,1035.42 1573.58,641.58 1475,543 1335,543 1264,614 1264,678 J2.1 1212,708 1054.94,708 922.94,840 R12.2 919,1061.18 864.18,1116 836,1116 727,1225 ; 727,1225 819.82,1317.82 1041.9,1317.82 1062.93,1338.84 1062.93,1410.33 1070,1417.4
  Component Side w20: R1.2 R1.2@1096.28,2005 ; L1.1 1098,2003.28 R1.2@1096.28,2005 ; R3.2 1658.5,2150 L3.2 1660.5,2032.5 1526.57,1898.57 C7.2 ; C6.2@1646.44,1520 1641.05,1514.61 1641.05,1510.13 1612,1481.08 v1(1612,1480) 1612,1471 1707.43,1375.57 1834.5,1375.57 L4.2 ; L2.1 1635.5,1905.5 1597,1867 v1(1570,1867) 1550.57,1867 C7.2 ; R1.2@1096.28,2005 1130.75,2005 1141,2015.25 1141,2031 1149,2039 1227,2039 1368.62,1897.38 C5.2 1443,1897.38 C4.1 1518.19,1899.38 C7.2
  Bottom Layer w10: C19.1 1058,1447 v1(1059,1448)
  Bottom Layer w20: v1(1570,1867) 1570,1522 v1(1612,1480)
SPI2_MISO: U3.1 U4.26 | length 619.8
  Component Side w10: U3.1 1020,1417.4 v1(1020,1541) ; U4.26 1290.68,1732.32 v1(1331,1692)
  Bottom Layer w10: v1(1020,1541) 1125.27,1646.27 1125.27,1678.27 1139,1692 v1(1331,1692)
SPI2_MOSI: U3.3 U4.27 | length 631.7
  Component Side w10: v1(942,1530) 942,1361.6 961,1342.6 U3.3 ; v1(1096,1684) 1124.63,1712.63 U4.27
  Bottom Layer w10: v1(942,1530) v1(1096,1684)
SPI2_SCK: U3.4 U4.45 | length 611
  Component Side w10: U3.4 1150,1342.6 1174,1366.6 1174,1405.77 1161,1418.77 v1(1161,1494.51) ; v1(1434.66,1569) 1460.66,1543 U4.45
  Bottom Layer w10: v1(1161,1494.51) 1235.49,1569 v1(1434.66,1569)
USB_N: D1.3 J1.2 U4.32 | length 781.8
  Component Side w8: J1.2 770.65,1639.77 788.79,1621.64 788.79,1621.54 796.02,1614.31 864.31,1614.31 889.77,1639.77 915.23,1614.31 954.14,1614.31 954.25,1614.2 U4.32 ; 763.23,1639.77 787.84,1615.16 881.16,1615.16 885.4,1619.4 D1.3
USB_P: D1.2 J1.3 U4.33 | length 767.5
  Component Side w8: J1.3 764.45,1614.18 782.32,1596.32 863.69,1596.32 882,1578 903,1578 919.52,1594.52 U4.33 ; 764,1614.18 781.18,1597 880,1597 885.4,1591.6 D1.2
VBus: C2.2 D1.4 J1.1 R2.1 U1.1 | length 679.6
  Component Side w10: 795.24,1665.36 D1.4@810.6,1650 ; D1.4 D1.4@810.6,1650 ; D1.4@810.6,1665 D1.4@810.6,1650 ; 862,1992.72 881.69,2012.4 U1.1
  Component Side w20: J1.1 795.24,1665.36 ; D1.4@810.6,1665 829.12,1683.52 829.12,1891.88 811,1910 811,1992 811.72,1992.72 827.72,1992.72 ; C2.2 835.62,2000.62 827.72,1992.72 ; 862,1992.72 827.72,1992.72
Vddsd: C8.2 C9.2 C10.2 C11.2 L1.2 U4.24 U4.25 | length 611.8
  Component Side w10: C11.2 1174,1762.44 1180.81,1755.63 1198.35,1755.63 1201.64,1752.35 1251.65,1752.35 U4.25 1281.53,1752 1303.18,1773.65 U4.24 ; C9.2 1245,1893 1245,1947.57 C8.2
  Component Side w20: C10.2 1085.78,1748.35 1111.35,1748.35 1134,1771 ; L1.2 1098,1874.52 1119,1853.52 1119,1839 1134,1824 1134,1771 ; C11.2 1174,1769.19 1172.19,1771 1134,1771 ; C9.2 1227.62,1854.38 1278.82,1803.18 U4.24@1300.96,1803.18
pads on no net: J1.4 J2.7 J2.A J2.B J2.C J2.D J2.E J2.F J2.G U4.3 U4.4 U4.11 U4.12 U4.13 U4.14 U4.15 U4.16 U4.21 U4.22 U4.28 U4.29 U4.35 U4.36 U4.41 U4.42 U4.43 X1.2 X1.4 X1.5 X1.6 X2.5 X2.6 X2.7 X2.8

## Polygon pours and split planes (outlines as drawn)
GND on Bottom Layer "BottomGnd" (solid, pour order 2): 618.11,500 cw(c618.11,618.11) 500,618.11 500,2350.39 cw(c618.11,2350.39) 618.11,2468.5 2350.39,2468.5 cw(c2350.39,2350.39) 2468.5,2350.39 2468.5,618.11 cw(c2350.39,618.11) 2350.39,500

## Keep-outs
Keep-Out Layer:
  the board outline again, w50

## Silkscreen, mask and mechanical layers (free items; w line width, h text height)
Top Overlay:
  lines w10: 1763,1726 cw(c1760.59,1723.59) 1764,1723.59 1764,1687 1764,1751 ; 1764,1728 ccw(c1768.83,1732.83) 1768.83,1726 1787,1726 ; 1784.59,1727 cw(c1784.59,1723.59) 1787,1726 ; 1789,1777 1789,1730.83 cw(c1782.17,1730.83) 1787,1726
  text "2017-04" at 2414,1597 h30 r90
  text "DFU" at 659,1340 h30
  text "RST" at 654,1035 h30
  text "PressureSensor V1" at 1694,540 h30
Mechanical 12:
  the board outline again, w10

## Text inside footprints (layer, text, board x,y; h text height)
J1: Mechanical 12 "Board Edge" at 490.77,1594.5 h10 r270